# Altium PCB MARCS ARM TB V1 PCB.PcbDoc
Units mil, origin at the board's own origin, x right, y up, seen from the top; angles counter-clockwise.
Board outline 3947.04 x 3947.04 mil, 4 copper layers (Top Layer, GND, Power, Bottom Layer), stack 30.634 mil thick; 42 components, 32 nets, 242 pads, 49 vias.
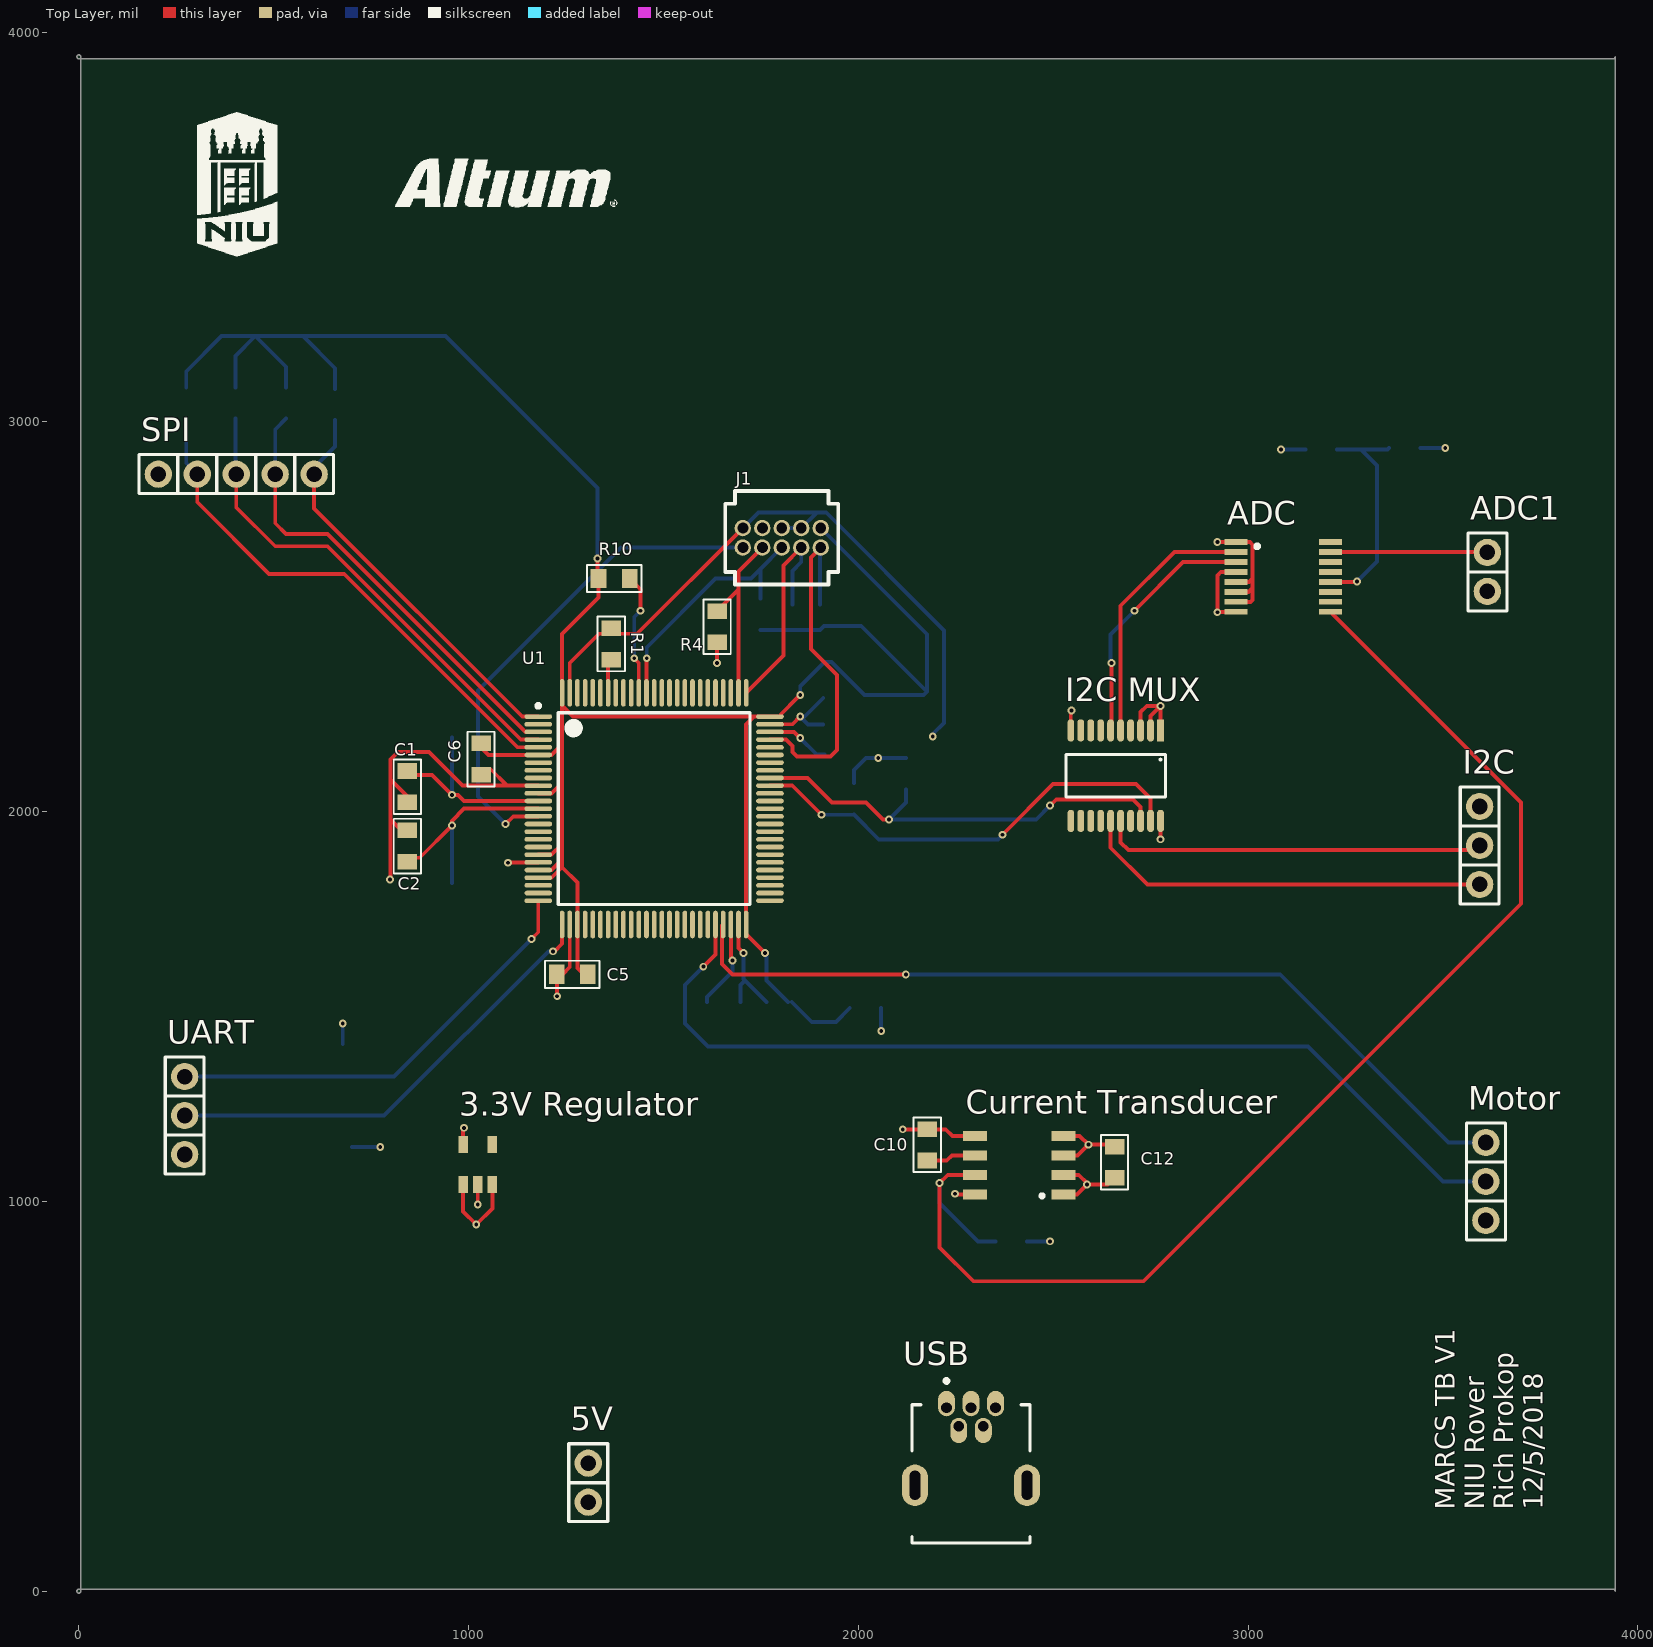
[diagram p0: Top Layer view]
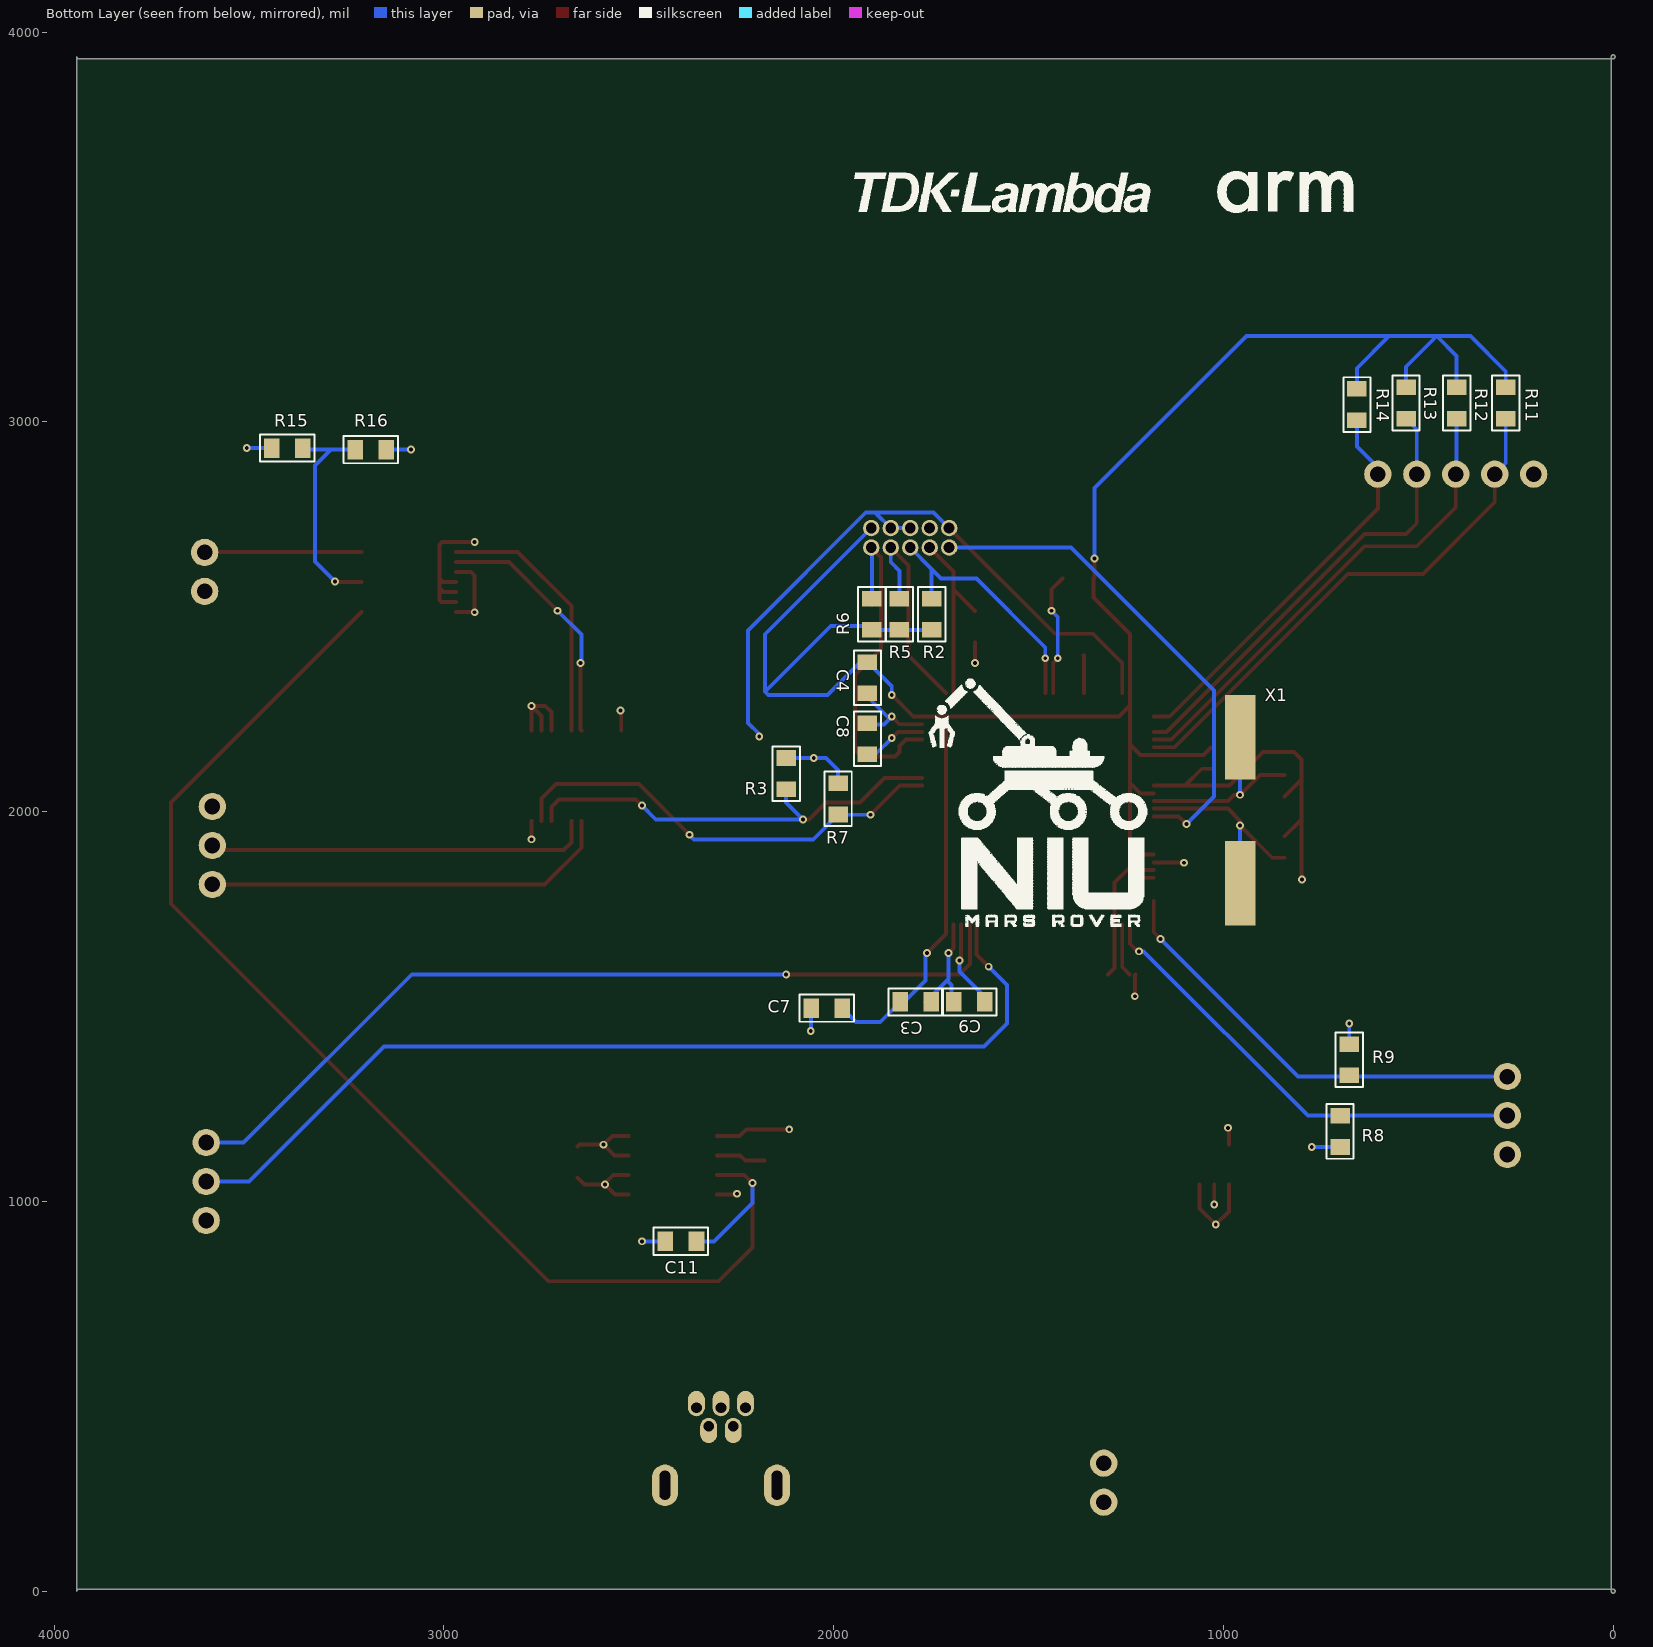
[diagram p1: Bottom Layer view, seen from below]
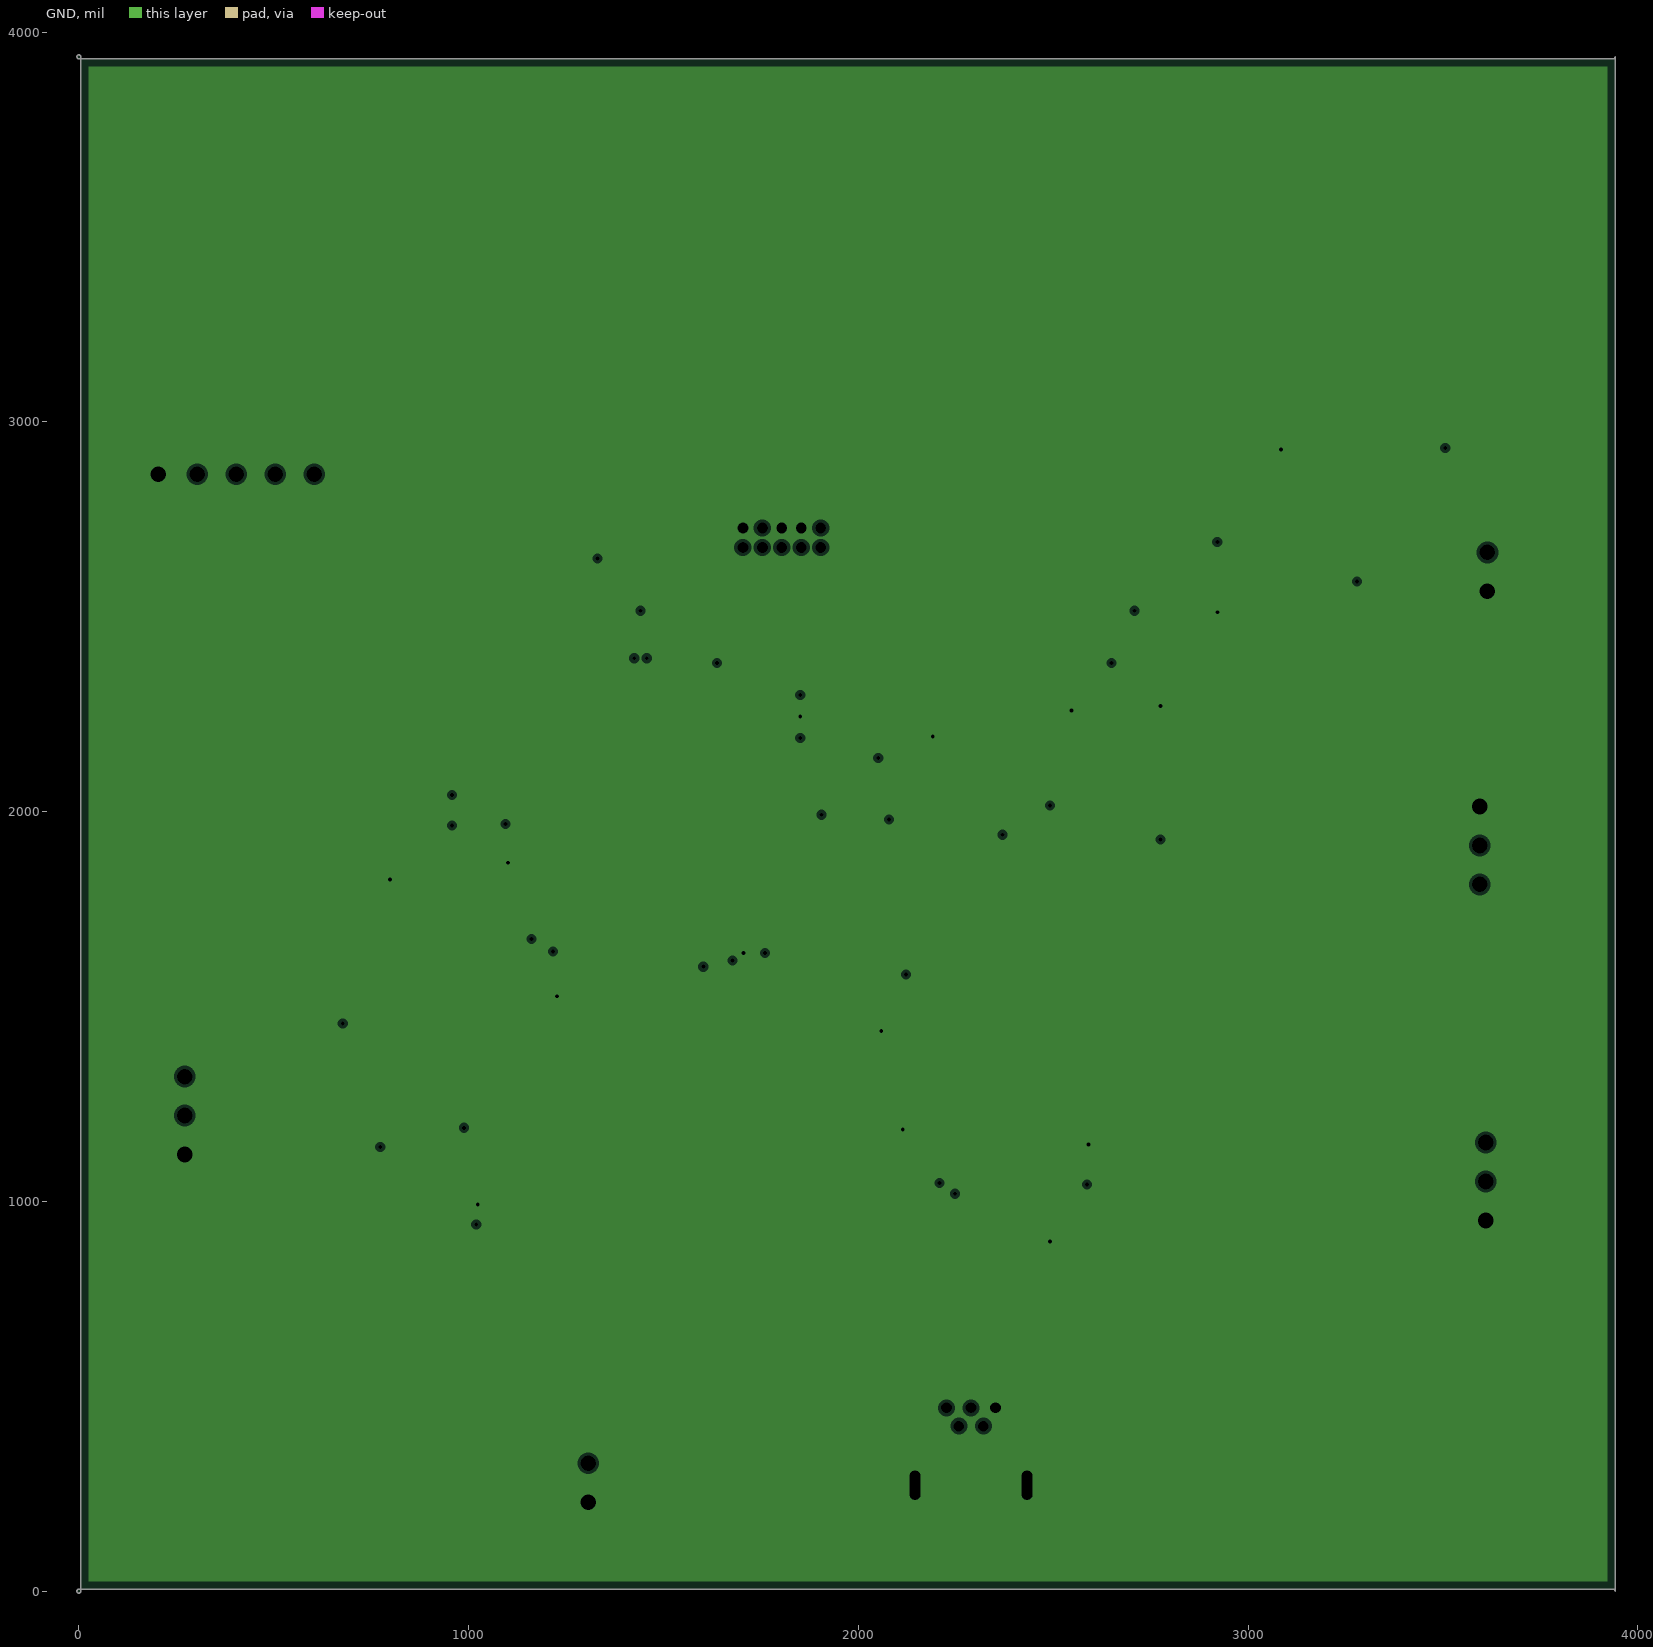
[diagram p2: GND, clearances drawn from the general rule]
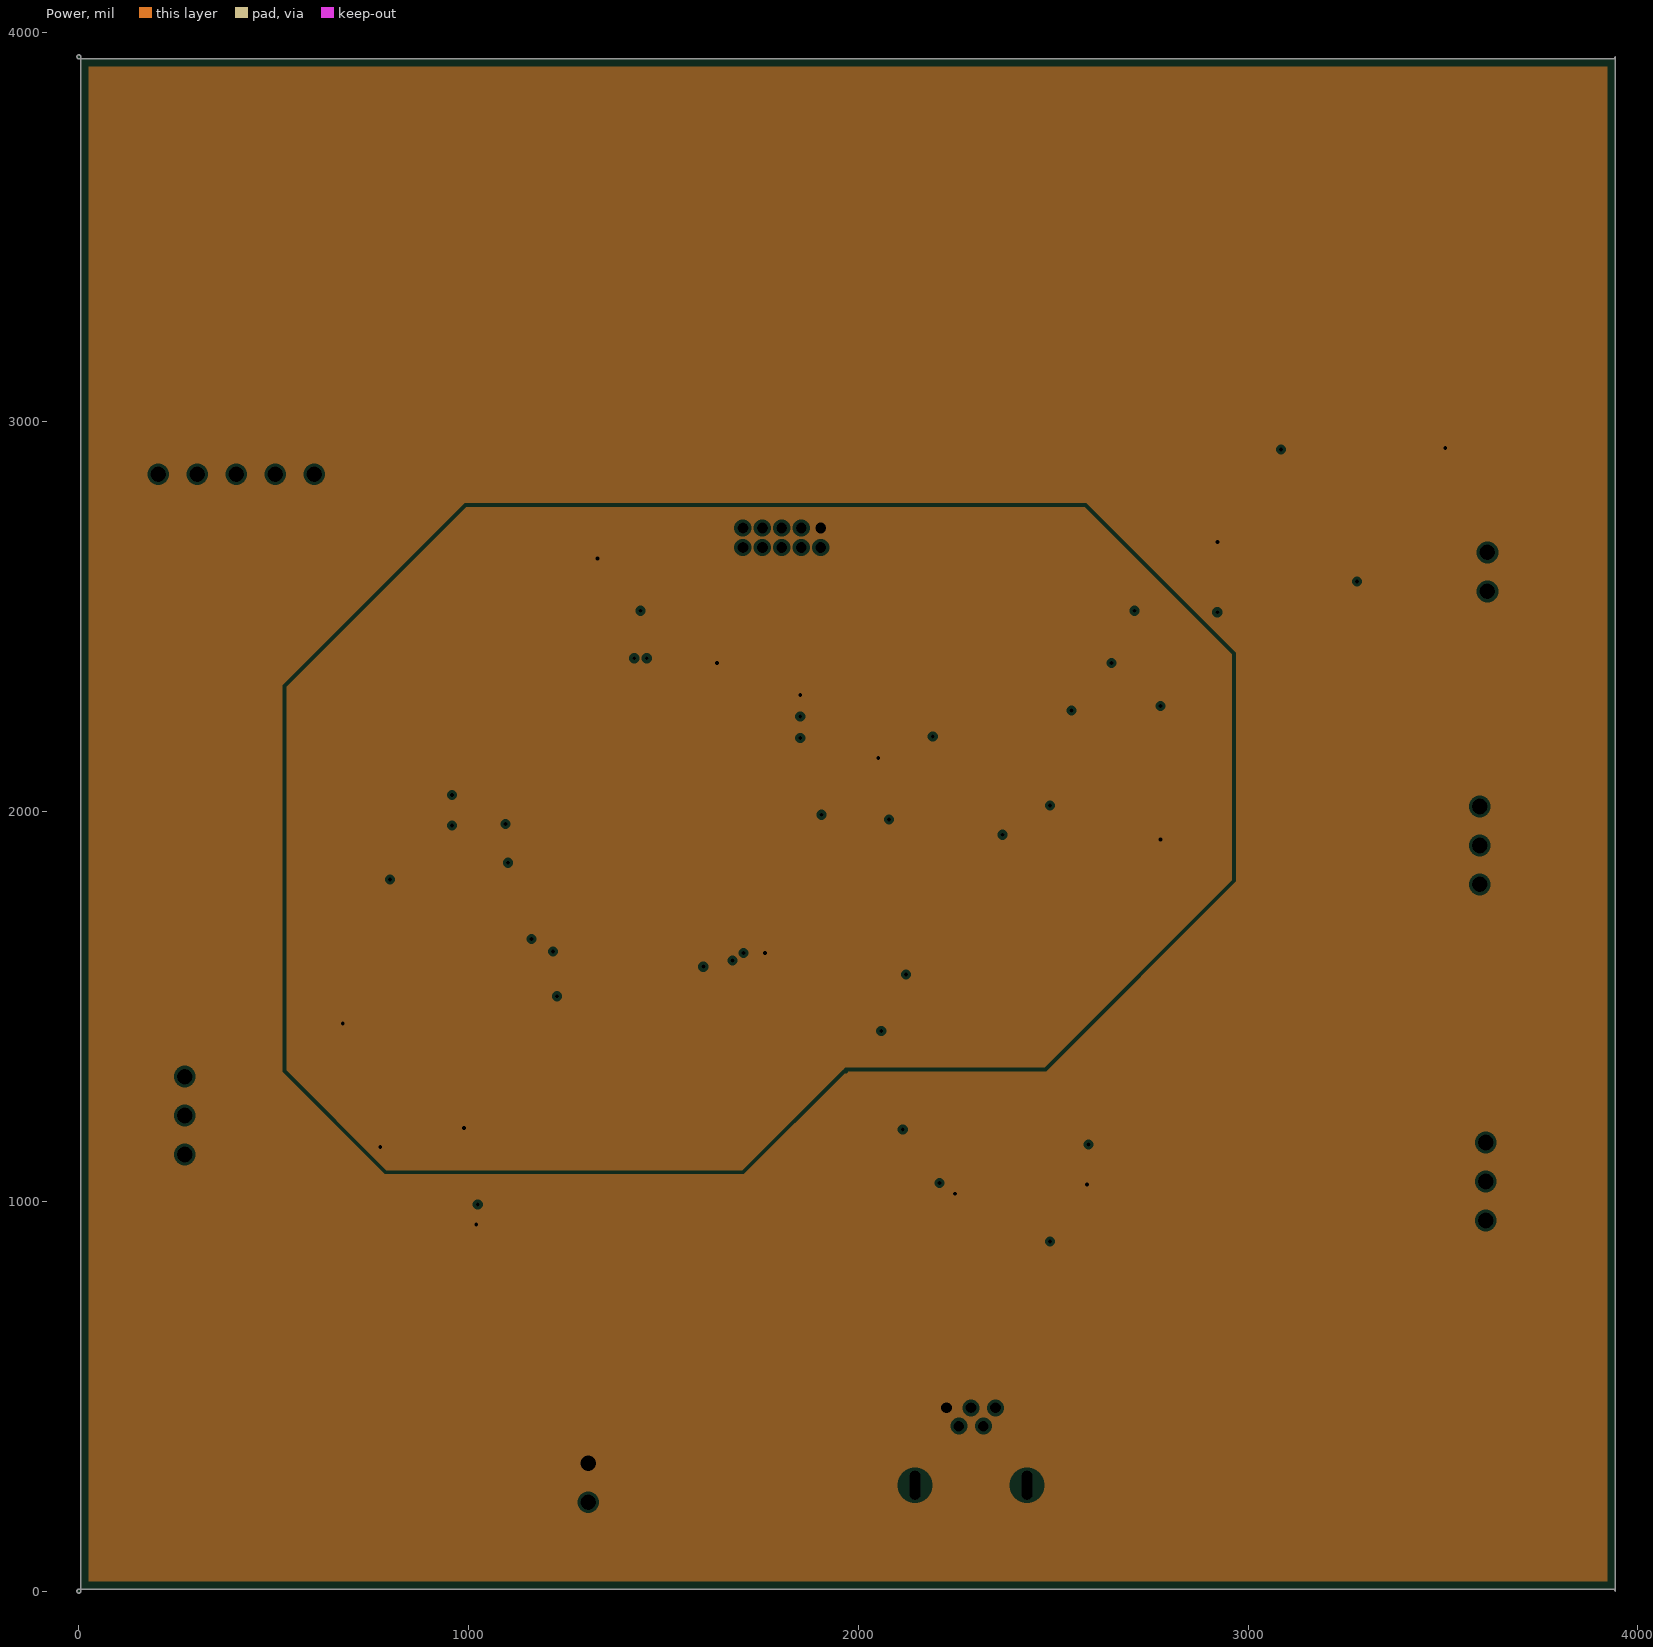
[diagram p3: Power, clearances drawn from the general rule]

## Layer stack, top to bottom
Top Solder: solder mask 0.4, Solder Resist, Dk 3.5
Top Layer: signal copper 1.4
Dielectric 1: core 10, FR-4, Dk 4.2
GND: plane copper 1.417, net GND
Dielectric 3: prepreg 5, Dk 4.2
Power: plane copper 1.417, net (Multiple Nets)
Dielectric 2: core 10, Dk 4.2
Bottom Layer: signal copper 1.4
Bottom Solder: solder mask 0.4, Solder Resist, Dk 3.5

## Board outline
0,-5.01 cw(c0,0) -5.01,0 cw(c0,0) 0,5.01 3937.01,5.01 cw(c3937.01,0) 3942.02,0 3942.02,3937.01 cw(c3937.01,3937.01) 3937.01,3931.99 0,3931.99 cw(c0,3937.01) -5.01,3937.01 cw(c0,3937.01) 0,3942.02 cw(c0,3937.01) 5.01,3937.01 5.01,0 cw(c0,0)

## Design rules (kind name [scope] priority, off if disabled: settings)
AssemblyTestPointUsage [All] p1 off:
AssemblyTestpoint [All] p1 off: testpointundercomponent=TRUE minsize=40 maxsize=100 preferedsize=60 minholesize=0 maxholesize=40 preferedholesize=32 testpointgrid=1 usegrid=TRUE gridtolerance=0.01 allowsidetop=TRUE allowsidebottom=TRUE
Clearance [All] p1: gap=5 ignorepadtopadclearanceinfootprint=FALSE
ComponentClearance [All] p1 off: gap=1 collisioncheckmode=3 verticalgap=1 showdistances=FALSE
DiffPairsRouting DiffPairsRouting_DIFF100 [InDifferentialPairClass('DIFFPAIR_100')] p1: maxlimit=10 minlimit=4 mostfreqgap=6 toplayer_minwidth=4 toplayer_maxwidth=13 toplayer_prefwidth=5 bottomlayer_minwidth=4 bottomlayer_maxwidth=13 bottomlayer_prefwidth=5 maxuncoupledlength=315
DiffPairsRouting DiffPairsRouting_DIFF105 [InDifferentialPairClass('DIFF105')] p2: maxlimit=15 minlimit=5 mostfreqgap=15 toplayer_minwidth=5 toplayer_maxwidth=5 toplayer_prefwidth=5 bottomlayer_minwidth=5 bottomlayer_maxwidth=5 bottomlayer_prefwidth=5 maxuncoupledlength=315
FabricationTestPointUsage [All] p1 off: valid=0 allowmultiple=FALSE
FabricationTestpoint [All] p1 off: side=3 testpointundercomponent=TRUE minsize=40 maxsize=100 preferedsize=60 minholesize=0 maxholesize=40 preferedholesize=32 testpointgrid=1 allowsidetop=TRUE allowsidebottom=TRUE usegrid=TRUE gridtolerance=0.01
Height [All] p1 off: minheight=0 maxheight=1000 prefheight=500
HoleSize [All] p1: absolutevalues=TRUE maxlimit=175 minlimit=10 maxpercent=80.000 minpercent=20.000
HoleToHoleClearance [All] p1: gap=4 allowstackedmicrovias=TRUE
MatchedLengths DiffPair_DIFF100MatchedLengths [InDifferentialPairClass('DIFF100')] p1: tolerance=250 checknetsindiffpair=TRUE checkdiffpairvsdiffpair=FALSE checkxsignals=FALSE checkothers=FALSE
MinimumSolderMaskSliver [All] p1: minsoldermaskwidth=2
PlaneClearance [All] p1: clearance=8
PlaneConnect ViasConnectSolid [IsVia] p1: planeconnectstyle=Direct reliefexpansion=6 reliefentries=4 reliefconductorwidth=6 reliefairgap=6
PlaneConnect [All] p2: planeconnectstyle=Direct reliefexpansion=5 reliefentries=4 reliefconductorwidth=6 reliefairgap=5
PolygonConnect "PolygonConnect Via" [IsVia] p1: connectstyle=Direct reliefconductorwidth=10 reliefentries=4 polygonreliefangle="90 Angle" airgapwidth=10
PolygonConnect [All] p2: connectstyle=Relief reliefconductorwidth=6 reliefentries=4 polygonreliefangle="90 Angle" airgapwidth=6
RoutingVias [All] p1: holewidth=10 width=20 viastyle="Through Hole" minholewidth=8 minwidth=18 maxholewidth=28 maxwidth=50
SilkToSilkClearance [All] p1: silktosilkclearance=0
SilkToSolderMaskClearance [IsPad] p1: minsilkscreentomaskgap=1 clearancetoexposedcopper=TRUE
SolderMaskExpansion covered [isvia] p1: expansion=-11
SolderMaskExpansion [All] p2: expansion=2
Width DiffPair_DIFF100Width [InDifferentialPairClass('DIFF100')] p1: maxlimit=8 minlimit=4 preferedwidth=5 checkconnectedcopper=TRUE
Width [All] p2: maxlimit=250 minlimit=6 preferedwidth=10 minimp=50.000000 maximp=50.000000 favimp=50.000000
16 further rules are at their usual default settings.

## Classes and differential pairs
component class "MARCS ARM TB ICs Schematic": "3.3V Regulator" ADC ADC1 C10 C11 C12 "Current Transducer" "I2C MUX" R15 R16 USB
component class "MARCS TB ARM Schematic": 5V C1 C2 C3 C4 C5 C6 C7 C8 C9 I2C J1 Motor R1 R2 R3 R4 R5 R6 R7 R8 R9 R10 R11 R12 R13 R14 SPI U1 UART X1

## Components (designator, comment, footprint, x,y, rotation, side; value= is the part's Value field where it differs from the comment)
"3.3V Regulator" "TLV73333PDBVR" TLV733P 1061.02,1043.31 r90 top
5V "HEADER 1X2" "Header 1x2" 1307.09,328.35 r0 top
ADC "ADC128D818" "ADC128D818 V3" 3003.94,2700.79 r270 top
ADC1 "HEADER 1X2" "Header 1x2" 3614.17,2665.35 r0 top
C1 "TBD" 0805C-GENERIC 843.11,2094.49 r270 top
C2 "TBD" 0805C-GENERIC 843.11,1882.01 r90 top
C3 "TBD" 0805C-GENERIC 1819.37,1511.81 r180 bottom
C4 "TBD" 0805C-GENERIC 1913.39,2374.02 r270 bottom
C5 "TBD" 0805C-GENERIC 1295.87,1582.68 r180 top
C6 "TBD" 0805C-GENERIC 1032.09,2165.24 r270 top
C7 "TBD" 0805C-GENERIC 1988.19,1496.06 r0 bottom
C8 "TBD" 0805C-GENERIC 1913.39,2157.48 r90 bottom
C9 "TBD" 0805C-GENERIC 1622.05,1511.81 r0 bottom
C10 "TBD" 0805C-GENERIC 2177.17,1115.04 r90 top
C11 "TBD" 0805C-GENERIC 2362.2,897.64 r0 bottom
C12 "TBD" 0805C-GENERIC 2657.48,1070.87 r90 top
"Current Transducer" "ACS724" "SOIC-8 V3" 2526.57,1018.11 r90 top
I2C "HEADER 1X3" "Header 1x3" 3594.49,1813.39 r180 top
"I2C MUX" "TCA9544A" TSSOP20 2775.59,2208.66 r270 top
J1 "FTSH-105-01-XXX-D-K" FTSH-105-01-XXX-D-K 1803.74,2702.76 r180 top locked
Motor "HEADER 1X3" "Header 1x3" 3610.24,1151.18 r0 top
R1 "TBD" 0805R-GENERIC 1366.14,2400.43 r90 top
R2 "TBD" 0805R-GENERIC 1748.62,2476.5 r90 bottom
R3 "TBD" 0805R-GENERIC 2122.05,2127.8 r270 bottom
R4 "TBD" 0805R-GENERIC 1637.8,2444.88 r90 top
R5 "TBD" 0805R-GENERIC 1831.3,2476.5 r90 bottom
R6 "TBD" 0805R-GENERIC 1902.17,2476.5 r90 bottom
R7 "TBD" 0805R-GENERIC 1988.78,2062.99 r270 bottom
R8 "TBD" 0805R-GENERIC 700.79,1149.61 r90 bottom
R9 "TBD" 0805R-GENERIC 677.17,1393.7 r270 bottom
R10 "TBD" 0805R-GENERIC 1343.39,2598.43 r0 top
R11 "TBD" 0805R-GENERIC 275.59,3078.74 r270 bottom
R12 "TBD" 0805R-GENERIC 401.57,3078.74 r270 bottom
R13 "TBD" 0805R-GENERIC 531.5,3078.74 r270 bottom
R14 "TBD" 0805R-GENERIC 657.48,3074.8 r270 bottom
R15 "TBD" 0805R-GENERIC 3372.2,2933.07 r0 bottom
R16 "TBD" 0805R-GENERIC 3217.8,2929.13 r180 bottom
SPI "HEADER 1X5" "Header 1x5" 203.94,2866.14 r90 top
U1 "STM32F401VCT6" STM-LQFP100_N 1476.18,2007.87 r0 top
UART "HEADER 1X3" "Header 1x3" 271.65,1320.47 r0 top
USB "Conn_Molex_54819-0519_eec" Molex_54819-0519_0 2289.37,301.18 r0 top
X1 "8MHz" GC0800044 996.65,2299.21 r270 bottom

## Footprints (in the part's own frame and the unit in brackets; to place one, negate y for a bottom-side part, rotate by r counter-clockwise, add the part's x,y. Pads: shape width x height; smd on the part's side, far side on the other; paste and mask are expansions set on the pad)
0805C-GENERIC [mil] "CAPACITOR 0805"
  rect 40x50 smd: 1(-10,0) 2(70,0)
  silkscreen extent -40,-35 100,35, body extent -11,-25 70,25, height 26
0805R-GENERIC [mil] "RESISTOR 0805"
  rect 40x50 smd: 1(-10,0) 2(70,0)
  silkscreen extent -40,-35 100,35, body extent -11,-25 70,25, height 27
"ADC128D818 V3" [mm]
  rect 0.37x1.5 smd mask+0.076: 1(0.225,-0.877) 2(0.875,-0.877) 3(1.525,-0.877) 4(2.175,-0.877) 5(2.825,-0.877) 6(3.475,-0.877) 7(4.125,-0.877) 8(4.775,-0.877) 9(4.775,5.277) 10(4.125,5.277) 11(3.475,5.277) 12(2.825,5.277) 13(2.175,5.277) 14(1.525,5.277) 15(0.875,5.277) 16(0.225,5.277)
  silkscreen extent 0.38,0.38 0.62,0.62, body extent 0.01,-0.99 5.01,5.41, height 1.13
FTSH-105-01-XXX-D-K [mil]
  round 42 hole 28 mask+3: 1(-100,-25) 2(-100,25) 3(-50,-25) 4(-50,25) 5(0,-25) 6(0,25) 7(50,-25) 8(50,25) 9(100,-25) 10(100,25)
  silkscreen extent -145,-120 145,120
GC0800044 [mm]
  rect 5.5x2 smd: 1(2.75,1) 2(12.25,1)
  body extent 1.29,-1.42 13.69,3.41, height 4.24
"Header 1x2" [mil] ".1\" Header"
  round 70 hole 40: 1(0,0) 2(0,-100)
  silkscreen extent -50,-150 50,50, body extent -50,-150 50,50, height 100
"Header 1x3" [mil] ".1\" Header"
  round 70 hole 40: 1(0,0) 2(0,-100) 3(0,-200)
  silkscreen extent -50,-250 50,50, body extent -50,-250 50,50, height 100
"Header 1x5" [mil] ".1\" Header"
  round 70 hole 40: 1(0,0) 2(0,-100) 3(0,-200) 4(0,-300) 5(0,-400)
  silkscreen extent -50,-450 50,50, body extent -50,-450 50,50, height 100
Molex_54819-0519_0 [mm]
  oval 1.1x1.65 hole 0.7 copper offset 0,0.275: 1(-1.6,4.3) 3(0,4.3) 5(1.6,4.3)
  oval 1.1x1.65 hole 0.7 copper offset 0,-0.275: 2(-0.8,3.1) 4(0.8,3.1)
  oval 1.7x2.7 hole 1.9 slot 0.7 at 0 deg paste-1000 mask+0: 6(-3.65,-0.75) 6(3.65,-0.75)
  silkscreen extent -3.85,-4.5 3.85,6.17, body extent -4.6,-4.6 4.6,5.5, height 3.98
"SOIC-8 V3" [mm]
  rect 0.65x1.575 smd: 1(0,0) 2(1.27,0) 3(2.54,0) 4(3.81,0) 5(3.81,5.775) 6(2.54,5.775) 7(1.27,5.775) 8(0,5.775)
  silkscreen extent -0.2,1.3 0,1.5, body extent -0.6,-0.18 4.41,6.02, height 1.88
STM-LQFP100_N [mm] "Thin QFP, 100-Leads, Body 14x14mm, Pitch 0.5mm, IPC Medium Density"
  oval 1.8x0.3 smd: 1(-7.55,6) 2(-7.55,5.5) 3(-7.55,5) 4(-7.55,4.5) 5(-7.55,4) 6(-7.55,3.5) 7(-7.55,3) 8(-7.55,2.5) 9(-7.55,2) 10(-7.55,1.5) 11(-7.55,1) 12(-7.55,0.5) 13(-7.55,0) 14(-7.55,-0.5) 15(-7.55,-1) 16(-7.55,-1.5) 17(-7.55,-2) 18(-7.55,-2.5) 19(-7.55,-3) 20(-7.55,-3.5) 21(-7.55,-4) 22(-7.55,-4.5) 23(-7.55,-5) 24(-7.55,-5.5) 25(-7.55,-6) 51(7.55,-6) 52(7.55,-5.5) 53(7.55,-5) 54(7.55,-4.5) 55(7.55,-4) 56(7.55,-3.5) 57(7.55,-3) 58(7.55,-2.5) 59(7.55,-2) 60(7.55,-1.5) 61(7.55,-1) 62(7.55,-0.5) 63(7.55,0) 64(7.55,0.5) 65(7.55,1) 66(7.55,1.5) 67(7.55,2) 68(7.55,2.5) 69(7.55,3) 70(7.55,3.5) 71(7.55,4) 72(7.55,4.5) 73(7.55,5) 74(7.55,5.5) 75(7.55,6)
  oval 0.3x1.8 smd: 26(-6,-7.55) 27(-5.5,-7.55) 28(-5,-7.55) 29(-4.5,-7.55) 30(-4,-7.55) 31(-3.5,-7.55) 32(-3,-7.55) 33(-2.5,-7.55) 34(-2,-7.55) 35(-1.5,-7.55) 36(-1,-7.55) 37(-0.5,-7.55) 38(0,-7.55) 39(0.5,-7.55) 40(1,-7.55) 41(1.5,-7.55) 42(2,-7.55) 43(2.5,-7.55) 44(3,-7.55) 45(3.5,-7.55) 46(4,-7.55) 47(4.5,-7.55) 48(5,-7.55) 49(5.5,-7.55) 50(6,-7.55) 76(6,7.55) 77(5.5,7.55) 78(5,7.55) 79(4.5,7.55) 80(4,7.55) 81(3.5,7.55) 82(3,7.55) 83(2.5,7.55) 84(2,7.55) 85(1.5,7.55) 86(1,7.55) 87(0.5,7.55) 88(0,7.55) 89(-0.5,7.55) 90(-1,7.55) 91(-1.5,7.55) 92(-2,7.55) 93(-2.5,7.55) 94(-3,7.55) 95(-3.5,7.55) 96(-4,7.55) 97(-4.5,7.55) 98(-5,7.55) 99(-5.5,7.55) 100(-6,7.55)
  silkscreen extent -7.67,-6.25 6.25,6.82, body extent -7,-7 7,7, height 1.6
TLV733P [mm] "3.3V Converter"
  rect 1.1x0.6 smd: 1(0,1.9) 2(0,0.95) 3(0,0) 4(2.6,0) 5(2.6,1.9)
  body extent -0.1,-0.48 2.7,2.42, height 1.2
TSSOP20 [mm]
  rect 1.45x0.45 smd: 1(0,0)
  oval 1.45x0.45 smd: 2(0,-0.65) 3(0,-1.3) 4(0,-1.95) 5(0,-2.6) 6(0,-3.25) 7(0,-3.9) 8(0,-4.55) 9(0,-5.2) 10(0,-5.85) 11(5.9,-5.85) 12(5.9,-5.2) 13(5.9,-4.55) 14(5.9,-3.9) 15(5.9,-3.25) 16(5.9,-2.6) 17(5.9,-1.95) 18(5.9,-1.3) 19(5.9,-0.65) 20(5.9,0)
  silkscreen extent 1.56,-6.18 4.34,0.33, body extent -0.28,-6.18 6.13,0.33, height 1.13

## Part data
"3.3V Regulator": library part TLV733
C1 C2 C3 C4 C5 C6 C7 C8 C9 C10 C11 C12: library part 0805C-TBD, "CAPACITOR 0805 CERAMIC VALUE TO BE DETERMINED"
"I2C MUX": Supplier Part Number 1=TCA9544APWR, Supplier 1="Arrow Electronics, Inc."
J1: "TERMINAL STRIP, .050\"(1.27mm) PITCH, 10 PINS, KEYING OPTION.", Manufacturer=SAMTEC, CREATED="September 26, 2016 - Wendy Xin", PCB DECAL=FTSH-105-01-XXX-D-K
R1 R2 R3 R4 R5 R6 R7 R8 R9 R10 R11 R12 R13 R14 R15 R16: library part 0805R-TBD, "RESISTOR 0805 VALUE TO BE DETERMINED"
U1: "ARM Cortex-M4 32-bit MCU+FPU, 105 DMIPS, 256 kB Flash, 64 kB Internal RAM, 79 I/Os, 100-pin LQFP, -40 to 85 degC, Tray", I/Os (High Current)=79, Manufacturer=STMicroelectronics, Operating Frequency(F) (Processor speed) (MHz)=84, Supplier Part Number 1=497-14048-ND, Supply Voltage(Vcc) max (V)=3.6, Supply Voltage(Vcc) min (V)=1.8, ComponentLink1Description="Manufacturer URL", ComponentLink1URL=http://www.st.com/web/en/home.html, ComponentLink2Description=Datasheet, ComponentLink2URL=http://www.st.com/st-web-ui/static/active/en/resource/technical/document/data_brief/DM00071938.pdf, ComponentLink3Description="Package Specification", ComponentLink3URL=http://www.st.com/st-web-ui/static/active/en/resource/technical/document/data_brief/DM00071938.pdf, Core="ARM Cortex-M4", DatasheetVersion="Rev. 1", FLASH Size (Prog) (kB)=256, Internal RAM Size (kB)=64, Mounting Technology="Surface Mount", PackageDescription="100-Pin Low Profile Quad Flat Package, 14 x 14 mm Body, 0.5 mm Pitch", PackageReference=LQFP100, PackageVersion="Rev. 1, 06/2013", Packing=Tray, Partnumber=STM32F401VCT6, Supplier 1=Digi-Key, Supplier 2=Newark, Supplier 3=Mouser, Supplier Part Number 2=19X6223, Supplier Part Number 3=511-STM32F401VCT6
USB: "CONN USB - mini B USB 2.0 OTG Receptacle Connector 5 Position Through Hole, Right Angle", Digikey Part Number=WM17115-ND, Manufacturer=Molex, Mouser Part Number=538-54819-0519, Package=CONN_PTH_7MM7_9MM0_USB, Part Number=54819-0519, Temperature="-20°C to +85°C", Temperature Range High=+85°C, Temperature Range Low=-20°C, ComponentLink1Description=Upverter, ComponentLink1URL=https://upverter.com/upn/revision/57f7d65304c3d878/, ComponentLink2Description=Datasheet, ComponentLink2URL=https://upverter.com/datasheet/9d71f2f8719b3fc0715bd6f9e6d9d5a5d296bb87.pdf, Digikey Description="CONN USB - mini B USB 2.0 OTG Receptacle Connector 5 Position Through Hole, Right Angle", helpURL=https://upverter.com/upn/revision/57f7d65304c3d878/, Is Female=yes, Lead Free=yes, RoHS=TRUE, Supplier 1=Digi-Key, Supplier 2=Mouser, Supplier Part Number 1=WM17115-ND, Supplier Part Number 2=538-54819-0519
X1: library part GC0800044, "Diodes Incorporated GC0800044", Supplier Part Number 1=GC0800044TR-ND, Supplier 1=Digi-Key

## Via types
v1: diameter 20, hole 10, Top Layer to Bottom Layer, 48 vias
v2: diameter 20/20 (per signal layer), hole 10, Top Layer to Bottom Layer, 1 vias

## Nets (pads, with @x,y where several pads share a name; then routed paths per layer and width w, separated by ;. In a path a pad name is that pad's centre, name@x,y a point inside that pad or via, vN(x,y) a via of type N, cw(c..) or ccw(c..) an arc to the next point about the centre after c; other vN are vias at no path point)
3.3V: "3.3V Regulator.5" "I2C MUX.20" C3.1 C4.1 C5.1 C6.1 C7.1 J1.1 R2.1 R3.1 R4.1 R5.1 R6.1 R7.1 R8.1 R9.1 R10.1 R11.1 R12.1 R13.1 R14.1 U1.6 U1.11 U1.19 U1.21 U1.22 U1.28 U1.50 U1.75 U1.100 | length 7120.9
  Top Layer w10: 986.22,1145.67 986.22,1187.01 v1(988.19,1188.98) ; C6.1@1032.09,2165.24 1051.65,2145.67 U1.6 1213.19,2145.67 1239.96,2172.44 ; U1.22 1213.19,1830.71 1239.96,1857.48 ; U1.21 1213.19,1850.39 1239.96,1877.17 ; U1.19 1213.19,1889.76 1239.96,1916.54 ; U1.11 1213.19,2047.24 1239.96,2074.02 ; C5.1@1295.87,1582.68 1279.33,1599.21 U1.28 1279.33,1818.11 1239.96,1857.48 ; v1(1330.71,2649.61) 1330.71,2601.1 R10.1 1333.39,2549.92 1239.96,2456.5 U1.100 U1.100@1239.96,2272.44 ; v1(1637.8,2381.89) R4.1 ; v1(1760.43,1637.8) 1712.4,1685.83 U1.50 1712.4,2223.62 1732.87,2244.09 ; v1(1850.98,2299.21) 1795.87,2244.09 U1.75 1732.87,2244.09 ; v1(2775.59,1929.13) 2775.59,1976.38 ; 1239.96,1857.48 1239.96,1877.17 ; 1239.96,1877.17 1239.96,1916.54 ; 1239.96,1916.54 1239.96,2074.02 ; 1239.96,2074.02 1239.96,2172.44 ; 1239.96,2172.44 U1.100@1239.96,2272.44 ; U1.100@1239.96,2272.44 1268.31,2244.09 1732.87,2244.09
  Bottom Layer w10: R11.1 275.59,3129.92 366.14,3220.47 452.76,3220.47 ; R12.1 401.57,3169.29 452.76,3220.47 ; R13.1 531.5,3141.73 452.76,3220.47 ; R14.1 657.48,3137.8 574.8,3220.47 ; R9.1 v1(677.17,1456.69) ; R8.1 v1(773.46,1139.61) ; v1(1330.71,2649.61) 1330.71,2830.71 940.94,3220.47 574.8,3220.47 ; R2.1 R5.1 R6.1 1912.17,2476.5 2007.56,2476.5 2176.18,2307.87 ; v1@1760.43,1637.68 v1(1760.43,1637.8) 1764.37,1633.86 1764.37,1566.81 C3.1@1819.37,1511.81 ; C3.1 1880.55,1460.63 1942.76,1460.63 C7.1 ; v1(1850.98,2299.21) 1850.98,2321.61 C4.1 1930.94,2384.02 2015.75,2299.21 2167.52,2299.21 2176.18,2307.87 ; J1.1 2176.18,2455.32 2176.18,2307.87 ; R7.1 1988.78,2106.89 2019.69,2137.8 v2(2051.18,2137.8) R3.1 ; 452.76,3220.47 574.8,3220.47
5V: 5V.1 "3.3V Regulator.1" "3.3V Regulator.3" "Current Transducer.1" "Current Transducer.2" "Current Transducer.8" ADC.1 ADC.5 ADC.6 ADC.7 C12.1 R15.2 USB.1 | length 945.2
  Top Layer w10: 986.22,1043.31 986.22,974.41 v1(1019.68,940.94) 1061.02,982.28 1061.02,1043.31 ; v1(2248.03,1019.68) 2249.61,1018.11 2299.21,1018.11 ; 2526.57,1018.11 2561.42,1018.11 v1(2586.61,1043.31) ; 2526.57,1068.11 2565.75,1068.11 2586.61,1047.24 v1(2586.61,1043.31) ; C12.1 2639.92,1043.31 v1(2586.61,1043.31) ; v1(2921.26,2691.93) ADC.1 3004.92,2691.93 3011.81,2685.04 3011.81,2598.43 ; ADC.7 3006.89,2538.39 3011.81,2543.31 3011.81,2574.8 ; ADC.6 3000.98,2563.98 3011.81,2574.8 ; ADC.5 3002.95,2589.57 3011.81,2598.43 ; 3011.81,2574.8 3011.81,2598.43
  Bottom Layer w10: R15.2 v1(3506.06,2933.07)
5V_Divider: ADC.12 R15.1 R16.1 | length 581.1
  Top Layer w10: ADC.12 3278.54,2589.57 v1(3279.53,2590.55)
  Bottom Layer w10: R16.1 3289.53,2929.13 ; v1(3279.53,2590.55) 3330.71,2641.73 3330.71,2887.95 3289.53,2929.13 ; R15.1 3358.27,2929.13 3289.53,2929.13
ADC_IN: ADC1.1 ADC.15 | length 402.9
  Top Layer w10: ADC.15 3613.19,2666.34 ADC1.1
ADC_SCL: "I2C MUX.6" ADC.3 | length 650.4
  Top Layer w10: 2647.64,2208.66 2649.61,2210.63 v1(2649.61,2381.89) ; v1(2708.66,2515.75) 2833.66,2640.75 ADC.3
  Bottom Layer w10: v1@2645.67,2381.89 v1(2649.61,2381.89) 2647.64,2383.86 2647.64,2454.72 v1(2708.66,2515.75)
ADC_SDA: "I2C MUX.5" ADC.2 | length 673.1
  Top Layer w10: 2673.23,2208.66 2673.23,2528.54 2811.02,2666.34 ADC.2
"Dig. Output": Motor.2 U1.46 | length 2509.6
  Top Layer w10: v1(1602.36,1602.36) 1633.66,1633.66 U1.46
  Bottom Layer w10: v1(1602.36,1602.36) 1555.12,1555.12 1555.12,1456.69 1614.17,1397.64 3153.54,1397.64 3500,1051.18 Motor.2
GND: 5V.2 "3.3V Regulator.2" "Current Transducer.3" "Current Transducer.4" "Current Transducer.5" "I2C MUX.1" "I2C MUX.2" "I2C MUX.3" "I2C MUX.10" ADC1.2 ADC.4 ADC.8 C1.2 C2.2 C3.2 C4.2 C5.2 C6.2 C7.2 C8.2 C9.2 C10.2 C11.2 C12.2 I2C.3 J1.3 J1.5 J1.9 Motor.3 R1.2 R16.2 SPI.1 U1.10 U1.20 U1.27 U1.49 U1.74 U1.99 UART.3 USB.5 USB.6 | length 4574.5
  Top Layer w10: v1(798.23,1825.79) 799.8,1827.36 799.8,1980.31 ; C2.2@843.11,1937.01 799.8,1980.31 ; C1.2@843.11,2039.49 842.99,2039.49 799.8,2082.68 ; v1(1023.62,992.13) 1023.62,1043.31 ; C6.2@1032.09,2110.24 1055.71,2110.24 1099.02,2066.93 ; v1@1101.38,1870.08 U1.20 ; U1.10 1099.02,2066.93 ; C5.2 1227.36,1581.18 v1(1227.36,1526.57) ; C5.2@1240.87,1582.68 1259.65,1601.46 U1.27 ; U1.99 1259.65,2381.69 1334.53,2456.57 1432.56,2456.57 J1.9 ; U1.49 1692.72,1650.39 v1(1705.32,1637.8) ; U1.74 1831.3,2224.41 v1(1850.98,2244.09) ; v1(2114.17,1185.04) C10.2 2224.41,1185.04 2241.34,1168.11 2299.21,1168.11 ; 2526.57,1118.11 2562.99,1118.11 v1(2590.55,1145.67) ; 2526.57,1168.11 2568.11,1168.11 v1(2590.55,1145.67) ; 2545.28,2208.66 2545.28,2257.87 v1(2547.24,2259.84) ; C12.2 2652.68,1145.67 v1(2590.55,1145.67) ; 2724.41,2208.66 2724.41,2255.91 2740.16,2271.65 v1(2775.59,2271.65) ; 2750,2208.66 2750,2246.06 v1(2775.59,2271.65) ; 2775.59,2208.66 v1(2775.59,2271.65) ; ADC.8 2922.24,2512.8 v1(2921.26,2511.81) 2921.26,2606.3 2930.12,2615.16 ADC.4 ; 799.8,1980.31 799.8,2082.68 ; 799.8,2082.68 799.8,2134.45 818.9,2153.54 898.23,2153.54 984.84,2066.93 1099.02,2066.93
  Bottom Layer w10: C9.2@1697.32,1511.81 1697.32,1555 1709.25,1566.93 ; J1.9 1743.7,2767.72 1893.7,2767.72 ; v1(1705.32,1637.8) 1705.32,1570.87 1709.25,1566.93 ; C3.2@1764.37,1511.81 1709.25,1566.93 ; J1.5 J1.3 1893.7,2767.72 ; C8.2@1910.04,2224.29 1870.79,2224.29 v1(1850.98,2244.09) 1862.68,2244.09 C4.2@1910.04,2291.46 ; C7.2 2058.19,1437.87 v1(2059.06,1437.01) ; v1(2191.14,2192.91) 2191.14,2199.02 2220.18,2228.05 2220.18,2465.45 1917.91,2767.72 1893.7,2767.72 ; C11.2 v1(2492.13,897.64) ; v1(3084.8,2929.13) R16.2
  other v1: 1101.38,1869.09
I2C_SCL: "I2C MUX.18" R3.2 U1.67 | length 1155.2
  Top Layer w10: U1.67 1870.08,2086.61 1933.07,2023.62 2019.69,2023.62 2062.99,1980.32 v1(2078.74,1980.32) ; v1(2492.13,2015.75) 2507.87,2031.5 2704.72,2031.5 2724.41,2011.81 2724.41,1976.38
  Bottom Layer w10: R3.2 2122.05,2023.62 v1(2078.74,1980.32) 2456.69,1980.32 v1(2492.13,2015.75)
I2C_SCL_Spare: "I2C MUX.15" I2C.1 | length 1054.7
  Top Layer w10: 2647.64,1976.38 2647.64,1907.48 2741.73,1813.39 I2C.1
I2C_SDA: "I2C MUX.19" R7.2 U1.66 | length 1165.7
  Top Layer w10: U1.66 1830.71,2066.93 v1(1905.51,1992.13) ; v1(2370.08,1940.94) 2500,2070.87 2712.6,2070.87 2750,2033.46 2750,1976.38
  Bottom Layer w10: v1(1905.51,1992.13) 1987.91,1992.13 R7.2 2052.64,1929.13 2358.27,1929.13 v1(2370.08,1940.94)
I2C_SDA_Spare: "I2C MUX.16" I2C.2 | length 989.4
  Top Layer w10: 2673.23,1976.38 2673.23,1921.26 2692.91,1901.57 3582.68,1901.57 I2C.2
JTCK/SWCLK: J1.4 R5.2 U1.76 | length 586.7
  Top Layer w10: U1.76 1807.68,2400.39 1807.68,2631.69 J1.4
  Bottom Layer w10: R5.2@1831.3,2531.5 R5.2 1831.3,2618.11 1853.74,2640.55 J1.4
JTDI: J1.8 R4.2 U1.77 | length 475.6
  Top Layer w10: R4.2 1692.72,2569.8 ; U1.77 1692.72,2569.8 ; J1.8 1692.72,2616.73 1692.72,2569.8
JTDO/SWO: J1.6 R2.2 U1.89 | length 645.7
  Top Layer w10: U1.89 1456.5,2392.91 v1(1457.28,2393.7)
  Bottom Layer w10: v1(1457.28,2393.7) 1457.28,2421.85 1633.86,2598.43 1724.41,2598.43 1748.62,2622.64 ; R2.2 1748.62,2622.64 ; J1.6 1748.62,2622.64
JTMS/SWDIO: J1.2 R6.2 U1.72 | length 910.7
  Top Layer w10: U1.72 1814.96,2185.04 1831.3,2168.7 1831.3,2152.95 1842.52,2141.73 1929.13,2141.73 1945.47,2158.07 1945.47,2350.39 1878.54,2417.32 1878.54,2652.56 J1.2
  Bottom Layer w10: R6.2@1902.17,2531.5 R6.2 1902.17,2676.18 J1.2
JTRST: R10.2 U1.90 | length 316.1
  Top Layer w10: R10.2 1440.94,2570.87 v1(1440.94,2515.75) ; v1(1425.2,2393.7) 1436.81,2382.09 U1.90
  Bottom Layer w10: v1(1425.2,2393.7) 1425.2,2500 v1(1440.94,2515.75)
NetC1_1: C1.1 U1.12 X1.1 | length 511.2
  Top Layer w10: C1.1@843.11,2094.49 906.1,2094.49 v1(957.28,2043.31) 973.03,2043.31 988.78,2027.56 U1.12
  Bottom Layer w10: v1(957.28,2043.31) X1.1
NetC2_1: C2.1 U1.13 X1.2 | length 542.5
  Top Layer w10: C2.1@843.11,1882.01 874.72,1882.01 v1(957.28,1964.57) 957.28,1976.38 988.78,2007.87 U1.13
  Bottom Layer w10: X1.2 v1(957.28,1964.57)
NetC8_1: C8.1 U1.73 | length 163.7
  Top Layer w10: U1.73 1835.24,2204.72 v1(1850.98,2188.98)
  Bottom Layer w10: v1(1850.98,2188.98) 1892.48,2147.48 C8.1
NetC9_1: C9.1 U1.48 | length 227.5
  Top Layer w10: U1.48 1673.03,1622.24 v1(1677.17,1618.11)
  Bottom Layer w10: C9.1 1612.05,1524.84 1677.17,1589.96 v1(1677.17,1618.11)
NetC10_1: "Current Transducer.6" C10.1 | length 129
  Top Layer w10: C10.1 2227.09,1105.04 2240.16,1118.11 2295.59,1118.11 2297.4,1116.3 2299.21,1118.11
NetR1_1: R1.1 U1.94 | length 96.8
  Top Layer w10: U1.94 1358.07,2400.79 R1.1@1358.86,2401.57
nRST: J1.10 U1.14 | length 1295.3
  Top Layer w10: v1(1095.08,1968.5) 1114.76,1988.19 U1.14
  Bottom Layer w10: v1(1095.08,1968.5) 1024.21,2039.37 1024.21,2311.02 1390.94,2677.76 J1.10
PWM: Motor.1 U1.47 | length 2252.2
  Top Layer w10: U1.47 1650.29,1707.57 1650.29,1609.55 1677.17,1582.68 v1(2122.05,1582.68)
  Bottom Layer w10: v1(2122.05,1582.68) 3082.68,1582.68 3514.17,1151.18 Motor.1
SPI_MISO: R12.2 SPI.3 U1.4 | length 1250.5
  Top Layer w10: SPI.3 403.94,2781.1 503.94,2681.1 637.8,2681.1 1133.86,2185.04 U1.4
  Bottom Layer w10: R12.2 401.57,2868.5 SPI.3
SPI_MOSI: R11.2 SPI.2 U1.5 | length 1361.6
  Top Layer w10: SPI.2 303.94,2794.49 488.19,2610.24 681.1,2610.24 1125.98,2165.35 U1.5
  Bottom Layer w10: R11.2 275.59,2894.49 SPI.2
SPI_NSS: R13.2 SPI.4 U1.3 | length 1176.8
  Top Layer w10: SPI.4 503.94,2740.16 531.5,2712.6 637.8,2712.6 1145.67,2204.72 U1.3
  Bottom Layer w10: SPI.4 503.94,2981.18 R13.2
SPI_SCK: R14.2 SPI.5 U1.1 | length 1045.2
  Top Layer w10: SPI.5 603.94,2777.95 1137.8,2244.09 U1.1
  Bottom Layer w10: SPI.5 603.94,2883.46 657.48,2937.01 R14.2
UART_RX: R8.2 U1.26 UART.2 | length 1200.3
  Top Layer w10: v1(1216.54,1641.73) 1220.47,1641.73 1239.96,1661.22 U1.26
  Bottom Layer w10: UART.2 783.46,1220.47 1204.72,1641.73 v1(1216.54,1641.73)
UART_TX: R9.2 U1.25 UART.1 | length 1141.6
  Top Layer w10: v1(1161.42,1673.23) 1178.94,1690.75 U1.25
  Bottom Layer w10: UART.1 808.66,1320.47 v1(1161.42,1673.23)
VIOUT_5V: "Current Transducer.7" ADC.9 C11.1 | length 3380.8
  Top Layer w10: 2299.21,1068.11 2229.53,1068.11 v1(2208.66,1047.24) 2208.66,881.89 2295.28,795.28 2732.28,795.28 3700.79,1763.78 3700.79,2023.72 ADC.9
  Bottom Layer w10: v1(2208.66,1047.24) 2208.66,996.06 2307.09,897.64 C11.1
pads on no net: "3.3V Regulator.4" "I2C MUX.4" "I2C MUX.7" "I2C MUX.8" "I2C MUX.9" "I2C MUX.11" "I2C MUX.12" "I2C MUX.13" "I2C MUX.14" "I2C MUX.17" ADC.10 ADC.11 ADC.13 ADC.14 ADC.16 J1.7 U1.2 U1.7 U1.8 U1.9 U1.15 U1.16 U1.17 U1.18 U1.23 U1.24 U1.29 U1.30 U1.31 U1.32 U1.33 U1.34 U1.35 U1.36 U1.37 U1.38 U1.39 U1.40 U1.41 U1.42 U1.43 U1.44 U1.45 U1.51 U1.52 U1.53 U1.54 U1.55 U1.56 U1.57 U1.58 U1.59 U1.60 U1.61 U1.62 U1.63 U1.64 U1.65 U1.68 U1.69 U1.70 U1.71 U1.78 U1.79 U1.80 U1.81 U1.82 U1.83 U1.84 U1.85 U1.86 U1.87 U1.88 U1.91 U1.92 U1.93 U1.95 U1.96 U1.97 U1.98 USB.2 USB.3 USB.4

## Polygon pours and split planes (outlines as drawn)
3.3V on Bottom Layer "Bottom Layer-3.3V" (solid, pour order 0): 1192.91,771.65
GND on GND (split plane): 3921.93,25.11 25.11,25.11 25.11,3911.9 3921.93,3911.9
3.3V on Power (split plane): 2959.47,2403.4 2959.47,1824.95 2478.2,1343.68 1968.5,1343.68 1966.55,1343.29 1964.9,1342.19 1963.79,1340.53 1963.41,1338.58 1961.46,1338.19 1959.8,1337.09 1702.61,1079.9 789.51,1079.9 532.66,1336.76 532.66,2320.72 994.24,2782.3 2580.57,2782.3
5V on Power (split plane): 3921.93,25.11 25.11,25.11 25.11,3911.9 3921.93,3911.9

## Other copper
Power (plane layer: these items are gaps in the copper):
  lines w10: 1968.5,1333.48 1963.41,1333.48 1704.72,1074.8 787.4,1074.8 527.56,1334.65 527.56,2322.83 992.13,2787.4 2582.68,2787.4 2964.57,2405.51 2964.57,1822.83 2480.32,1338.58 1968.5,1338.58

## Silkscreen, mask and mechanical layers (free items; w line width, h text height)
Top Overlay:
  drawing of 21 lines, arcs and shapes, not listed
  text "MARCS TB V1 / NIU Rover / Rich Prokop / 12/5/2018" at 3755.91,208.66 h50 r90
Bottom Overlay:
  drawing of 33 lines, arcs and shapes, not listed
Mechanical 15:
  lines w10: 0,1500 0,0 ; 0,0 0,3937.01 3937.01,3937.01 3937.01,0 0,0